# Altium PCB PCB_DTNEA-PRESS-MONITOR-RECIEVER_2021-11-17.pcbdoc
Units mm, origin at the board's own origin, x right, y up, seen from the top; angles counter-clockwise.
Board outline 112.01 x 83.69 mm, 2 copper layers (Top Layer, Bottom Layer); 32 components, 38 nets, 128 pads, 25 vias.
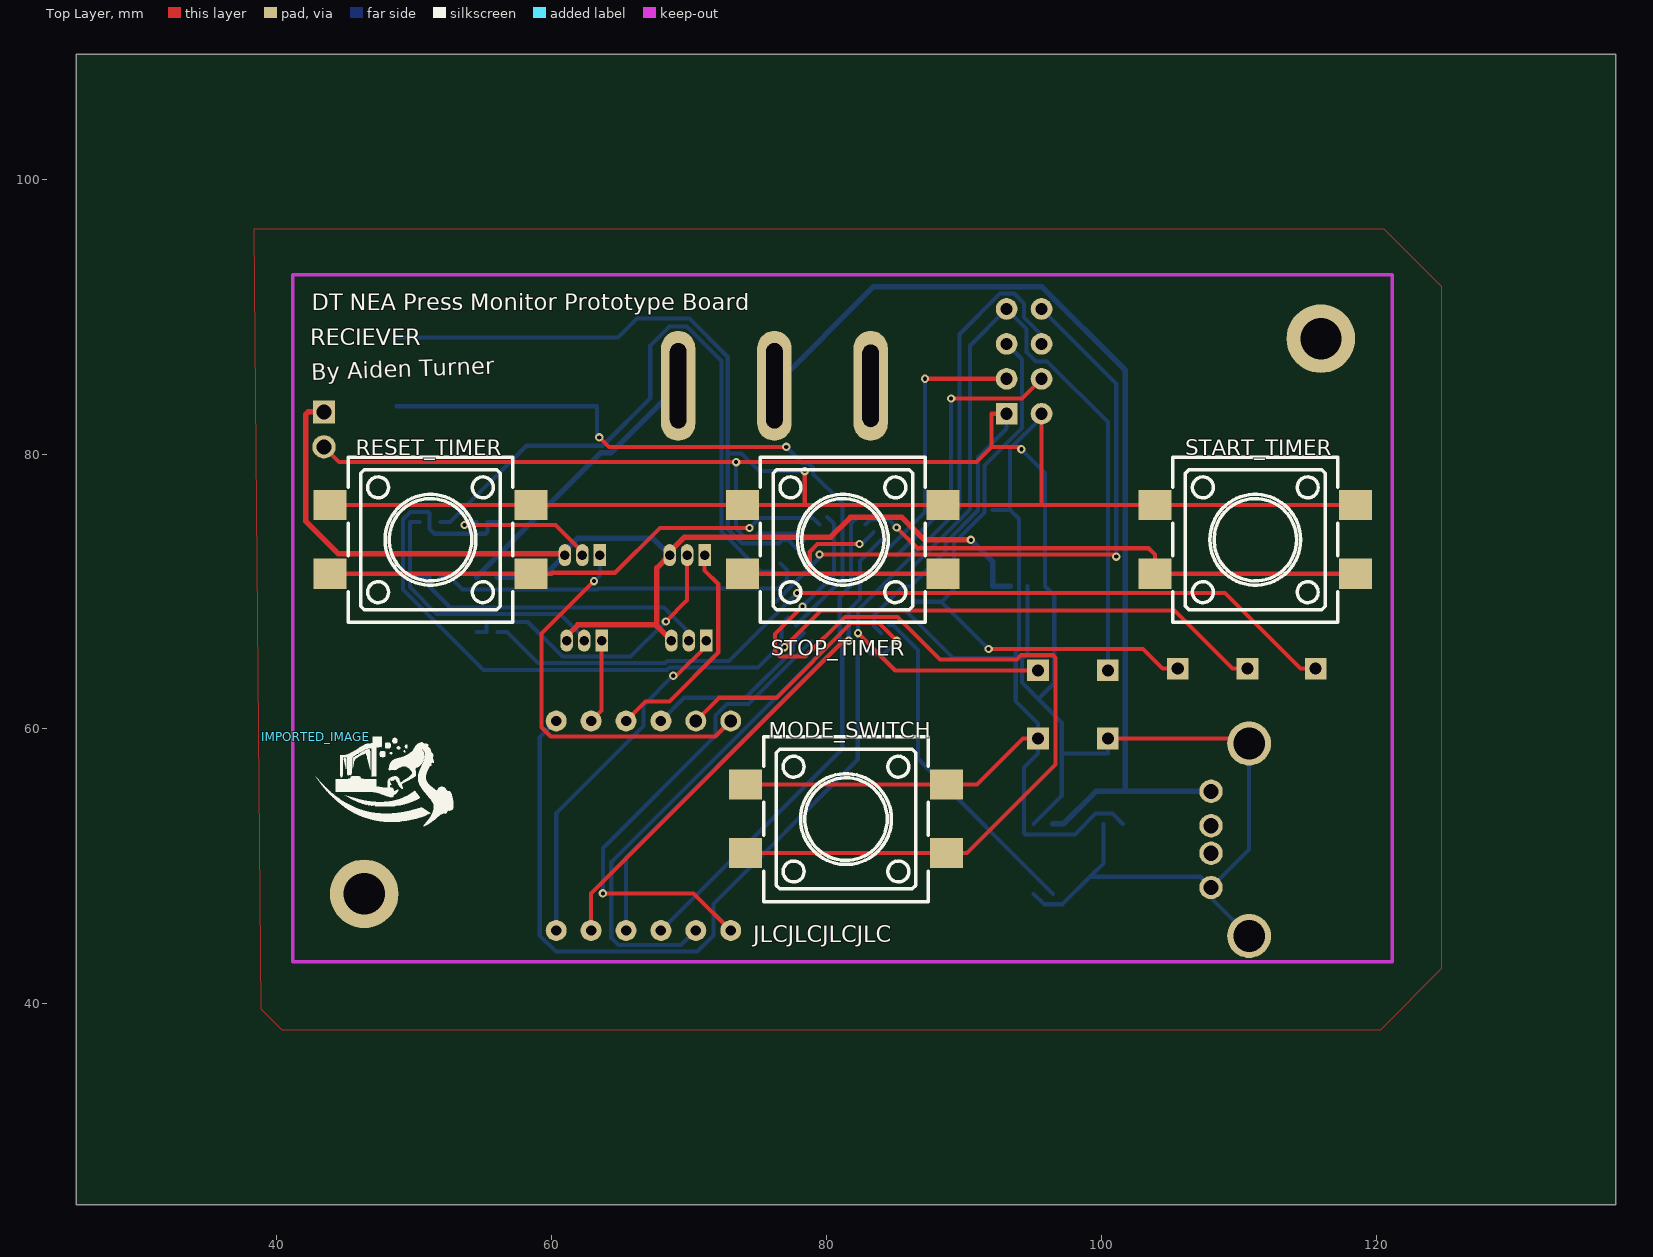
[diagram p0: Top Layer view]
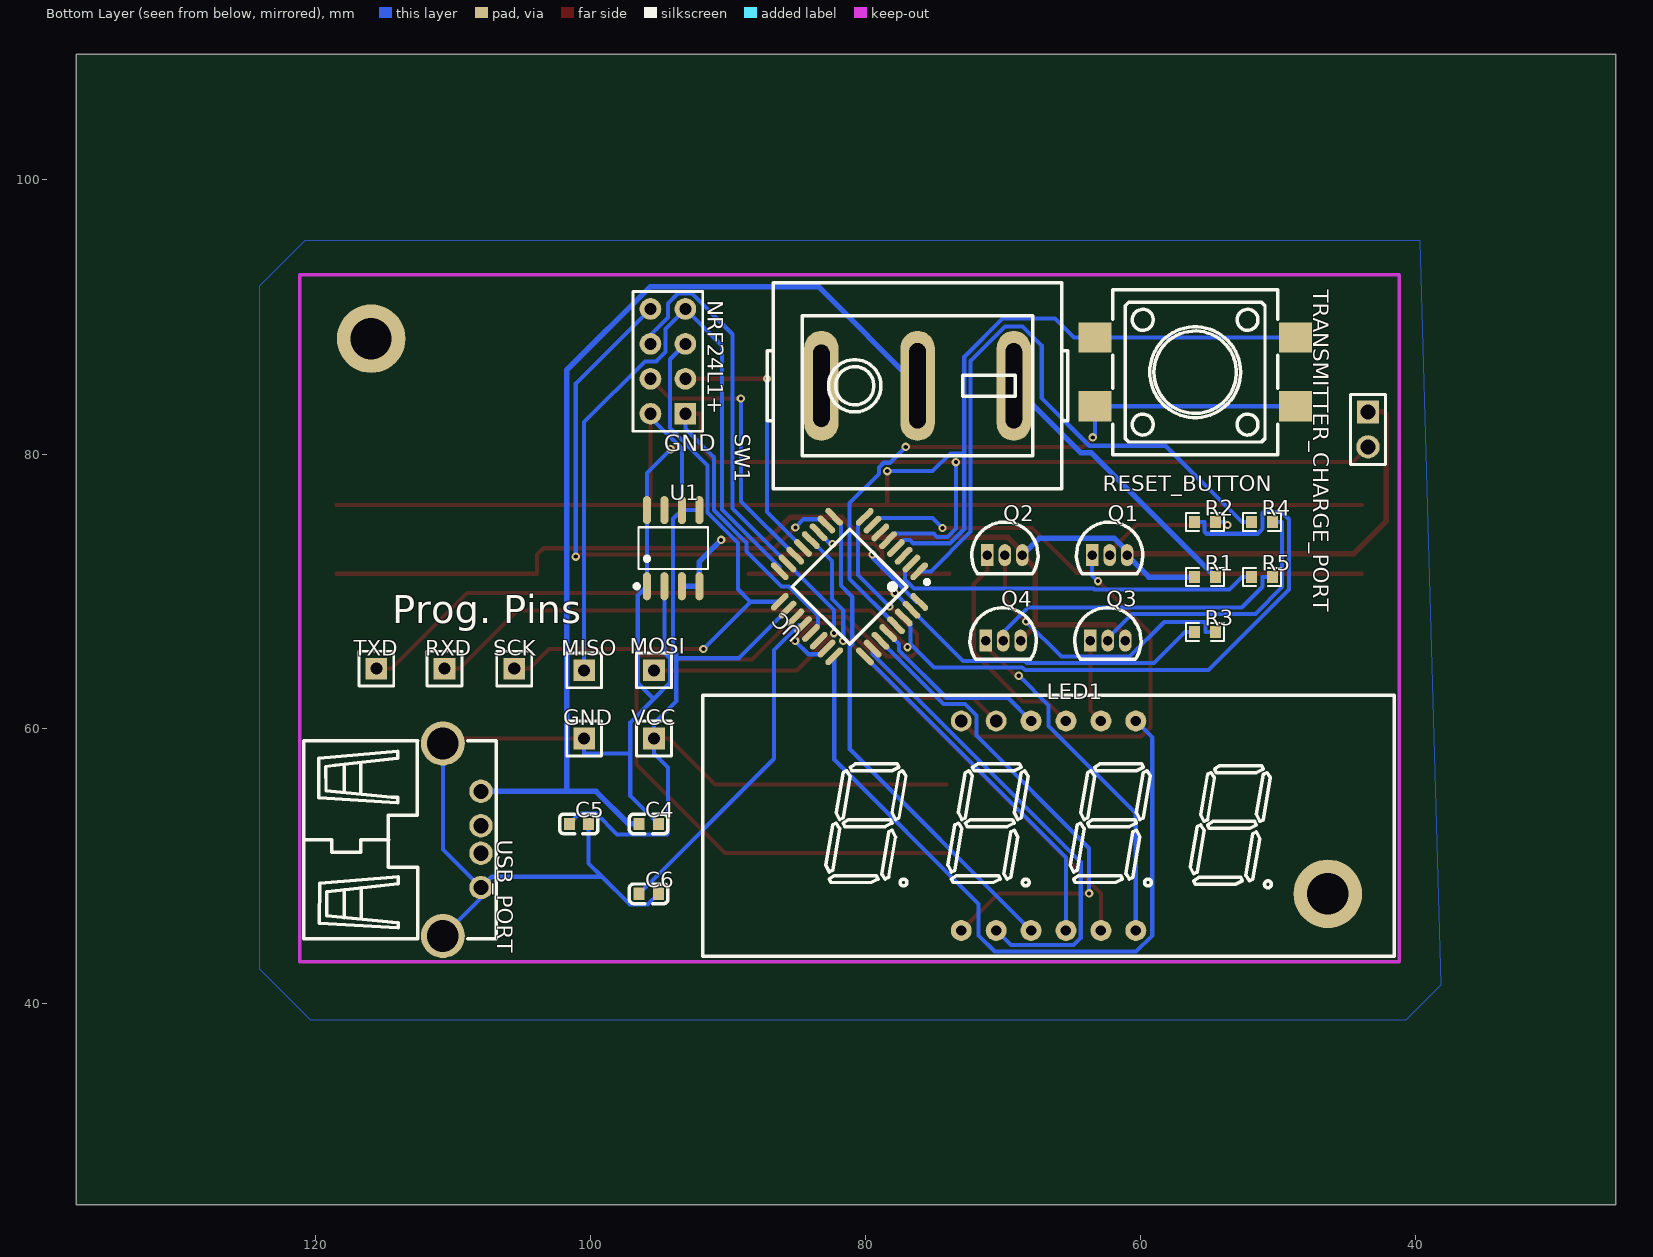
[diagram p1: Bottom Layer view, seen from below]

## Layer stack, top to bottom
Top Layer: signal copper (thickness not stored)
Dielectric: dielectric 0.32, FR-4, Dk 4.8
Bottom Layer: signal copper (thickness not stored)

## Board outline
137.414,25.4 25.4,25.4 25.4,109.093 137.414,109.093

## Components (designator, comment, footprint, x,y, rotation, side; value= is the part's Value field where it differs from the comment)
C4 "1uF" C0603 95.758,53.086 r0 bottom
C5 "1uF" C0603 100.838,53.086 r0 bottom
C6 "1uF" C0603 95.758,48.006 r0 bottom
GND "HDR-M-2.54_1x1" HDR-M-2.54_1X1 100.457,59.309 r0 bottom
IMPORTED_IMAGE "IMPORTED_IMAGE" IMPORTED_IMAGE 42.842,59.427 r0 top
LED1 "SR720561W" LED-SEG-TH_12P-L50.3-W19.0-P2.54-S15.24-BL 66.675,52.959 r0 bottom
MISO "HDR-M-2.54_1x1" HDR-M-2.54_1X1 100.457,64.262 r0 bottom
MODE_SWITCH "TS-1094S-A4B3-D1" KEY-SMD_4P-L12.0-W12.0-P5.00-LS15.2#1 81.407,53.467 r0 top
MOSI "HDR-M-2.54_1x1" HDR-M-2.54_1X1 95.377,64.262 r0 bottom
NRF24L1+ "HDR-M-2.54_2x4" HDR-M-2.54_2X4 94.361,86.741 r270 bottom
Q1 "2N3904" TO-92-3_L5.1-W4.1-P1.27-L 62.23,72.644 r0 bottom
Q2 "2N3904" TO-92-3_L5.1-W4.1-P1.27-L 69.85,72.644 r0 bottom
Q3 "2N3904" TO-92-3_L5.1-W4.1-P1.27-L 62.357,66.421 r0 bottom
Q4 "2N3904" TO-92-3_L5.1-W4.1-P1.27-L 69.977,66.421 r0 bottom
R1 "1k" R0603 55.292,71.053 r0 bottom
R2 "1k" R0603 55.292,75.053 r0 bottom
R3 "1k" R0603 55.292,67.053 r0 bottom
R4 "1k" R0603 51.148,75.053 r0 bottom
R5 "1k" R0603 51.148,71.053 r0 bottom
RESET_BUTTON "TS-1094S-A4B3-D1" KEY-SMD_4P-L12.0-W12.0-P5.00-LS15.2#2 56.007,85.979 r0 bottom
RESET_TIMER "TS-1094S-A4B3-D1" KEY-SMD_4P-L12.0-W12.0-P5.00-LS15.2#1 51.181,73.787 r0 top
RXD "HDR-M-2.54_1x1" HDR-M-2.54_1X1 110.617,64.389 r0 bottom
SCK "HDR-M-2.54_1x1" HDR-M-2.54_1X1 105.537,64.389 r0 bottom
START_TIMER "TS-1094S-A4B3-D1" KEY-SMD_4P-L12.0-W12.0-P5.00-LS15.2#1 111.181,73.787 r0 top
STOP_TIMER "TS-1094S-A4B3-D1" KEY-SMD_4P-L12.0-W12.0-P5.00-LS15.2#1 81.181,73.787 r0 top
SW1 "Rocker switch601-10211BB" SW-TH_601-10211BB 76.2,84.963 r0 bottom
TRANSMITTER_CHARGE_PORT "HDR-M-2.54_1x2" HDR-M-2.54_1X2 43.434,81.788 r90 bottom
TXD "HDR-M-2.54_1x1" HDR-M-2.54_1X1 115.57,64.389 r0 bottom
U1 "TPS77633DR" SOIC-8_L4.9-W3.9-P1.27-LS6.0-BL 93.98,73.152 r0 bottom
UC "ATMEGA328PB-AU" TQFP-32_L7.0-W7.0-P0.80-LS9.0-BL 81.153,70.358 r225 bottom
USB_PORT "A/F90 PBT White plastic_C42665" USB-A-TH_USB-M-1 109.347,51.943 r90 bottom
VCC "HDR-M-2.54_1x1" HDR-M-2.54_1X1 95.377,59.309 r0 bottom

## Footprints (in the part's own frame and the unit in brackets; to place one, negate y for a bottom-side part, rotate by r counter-clockwise, add the part's x,y. Pads: shape width x height; smd on the part's side, far side on the other; paste and mask are expansions set on the pad)
C0603 [mm]
  rect 0.8x0.9 smd: 1(0.7,0) 2(-0.7,0)
  silkscreen extent -1.39,-0.72 1.41,0.71
HDR-M-2.54_1X1 [mil]
  rect 62x62 hole 35: 1(0,0)
  silkscreen extent -50,-50 50,50
HDR-M-2.54_1X2 [mm]
  rect 1.7x1.575 hole 1.1: 1(1.27,0)
  round 1.7 hole 1.1: 2(-1.27,0)
  silkscreen extent -2.54,-1.27 2.54,1.27
HDR-M-2.54_2X4 [mil]
  rect 62x62 hole 35: 1(150,50)
  round 62 hole 35: 2(150,-50) 3(50,50) 4(50,-50) 5(-50,50) 6(-50,-50) 7(-150,50) 8(-150,-50)
  silkscreen extent -200,-100 200,100
IMPORTED_IMAGE [mm]
  silkscreen extent 0,-6.5 10,0
KEY-SMD_4P-L12.0-W12.0-P5.00-LS15.2#1 [mm]
  rect 2.4x2.2 smd: 1(-7.3,2.5) 2(7.3,2.5) 3(-7.3,-2.5) 4(7.3,-2.5)
  silkscreen extent -6,-6.02 6,5.98
KEY-SMD_4P-L12.0-W12.0-P5.00-LS15.2#2 [mm]
  rect 2.4x2.2 smd: 1(7.3,-2.5) 2(-7.3,-2.5) 3(7.3,2.5) 4(-7.3,2.5)
  silkscreen extent -6,-5.98 6,6.02
LED-SEG-TH_12P-L50.3-W19.0-P2.54-S15.24-BL [mil]
  round 60 hole 30: 1(250,300) 2(150,300) 3(50,300) 4(-50,300) 5(-150,300) 6(-250,300) 7(-250,-300) 8(-150,-300) 9(-50,-300) 10(50,-300)
  round 60 hole 36: 11(150,-300) 12(250,-300)
  silkscreen extent -990,-374 990,374
R0603 [mm]
  rect 0.806x0.864 smd: 1(0.753,0) 2(-0.753,0)
  silkscreen extent -1.39,-0.66 1.39,0.66
SOIC-8_L4.9-W3.9-P1.27-LS6.0-BL [mm]
  oval 0.588x2.045 smd: 1(1.905,2.773) 2(0.635,2.773) 3(-0.635,2.773) 4(-1.905,2.773) 5(-1.905,-2.773) 6(-0.635,-2.773) 7(0.635,-2.773) 8(1.905,-2.773)
  silkscreen extent -2.53,-1.52 2.8,2.92
SW-TH_601-10211BB [mm]
  oval 2.5x8 hole 1.2 slot 6 at 90 deg: 1(7,0)
  oval 2.5x8 hole 1.2 slot 6.2 at 90 deg: 2(0,0) 3(-7,0)
  silkscreen extent -10.92,-7.5 10.92,7.5
TO-92-3_L5.1-W4.1-P1.27-L [mm]
  rect 0.9x1.6 hole 0.7: 1(1.27,0)
  oval 0.9x1.6 hole 0.7: 2(0,0) 3(-1.27,0)
  silkscreen extent -2.41,-2.41 2.41,1.35
TQFP-32_L7.0-W7.0-P0.80-LS9.0-BL [mm]
  oval 0.45x1.65 smd: 1(2.8,4.369) 2(2,4.369) 3(1.2,4.369) 4(0.4,4.369) 5(-0.4,4.369) 6(-1.2,4.369) 7(-2,4.369) 8(-2.8,4.369) 17(-2.8,-4.369) 18(-2,-4.369) 19(-1.2,-4.369) 20(-0.4,-4.369) 21(0.4,-4.369) 22(1.2,-4.369) 23(2,-4.369) 24(2.8,-4.369)
  oval 1.65x0.45 smd: 9(-4.382,2.8) 10(-4.382,2) 11(-4.382,1.2) 12(-4.382,0.4) 13(-4.382,-0.4) 14(-4.382,-1.2) 15(-4.382,-2) 16(-4.382,-2.8) 25(4.381,-2.8) 26(4.381,-2) 27(4.381,-1.2) 28(4.381,-0.4) 29(4.381,0.4) 30(4.381,1.2) 31(4.381,2) 32(4.381,2.8)
  silkscreen extent -2.94,-2.95 3.91,4.36
USB-A-TH_USB-M-1 [mm]
  round 1.7 hole 1.1: 1(3.52,-1.386) 2(1.019,-1.386) 3(-0.98,-1.386) 4(-3.48,-1.386)
  round 3.2 hole 2.3: 5(7,1.386) 6(-7,1.386)
  silkscreen extent -7.2,-2.49 7.2,11.51

## Free pads (board coordinates)
  round 5 hole 3: 1(46.355,48.006) 1(115.951,88.392)

## Via types
v1: diameter 0.61, hole 0.305, Top Layer to Bottom Layer, 25 vias

## Nets (pads, with @x,y where several pads share a name; then routed paths per layer and width w, separated by ;. In a path a pad name is that pad's centre, name@x,y a point inside that pad or via, vN(x,y) a via of type N, cw(c..) or ccw(c..) an arc to the next point about the centre after c; other vN are vias at no path point)
GND: C4.2 C5.2 C6.2 GND.1 NRF24L1+.1 TRANSMITTER_CHARGE_PORT.2 U1.1 U1.2 U1.8 UC.5 UC.21 USB_PORT.4 USB_PORT.5 USB_PORT.6 | length 174.9
  Top Layer w0.3: TRANSMITTER_CHARGE_PORT.2 44.541,79.411 v1(73.415,79.411) 90.892,79.411 91.999,80.518 ; NRF24L1+.1 91.999,82.931 91.999,80.518 ; v1@94.167,80.342 93.99,80.518 91.999,80.518 ; GND.1 110.367,59.309 USB_PORT.5
  Bottom Layer w0.3: v1(73.415,79.411) 73.415,74.572 74.022,73.964 74.773,73.964 75.026,74.218 77.859,74.218 UC.5 ; UC.21 83.453,67.493 83.453,68.261 85.55,70.358 86.104,70.358 88.645,72.899 88.645,73.543 91.012,75.91 91.012,79.761 93.091,81.839 NRF24L1+.1 ; v1@94.167,80.342 95.885,78.623 U1.8 95.885,70.38 96.558,69.707 96.558,63.35 95.394,62.186 ; U1.2@94.615,70.38 94.615,65.534 94.207,65.126 94.207,63.372 95.394,62.186 ; C6.2 95.813,47.251 97.163,47.251 99.16,49.248 ; C4.2 97.098,55.126 97.098,58.217 ; C5.2 100.138,50.227 99.16,49.248 ; GND.1 100.457,58.217 97.098,58.217 ; USB_PORT.6 107.961,47.714 USB_PORT.4 ; USB_PORT.5 110.733,51.234 USB_PORT.4 ; 95.394,62.186 97.098,60.481 97.098,58.217 ; 99.16,49.248 107.176,49.248 USB_PORT.4
  other v1: 94.167,80.341
LED1_6: LED1.6 Q4.1 | length 25.7
  Top Layer w0.3: v1(68.836,63.873) 69.073,63.873 71.247,66.047 Q4.1
  Bottom Layer w0.3: LED1.6 60.325,53.865 66.675,60.215 66.675,61.712 v1(68.836,63.873)
LED1_8: LED1.8 Q3.1 | length 6.2
  Top Layer w0.3: LED1.8 63.627,61.341 Q3.1
LED1_9: LED1.9 Q2.1 | length 16.3
  Top Layer w0.3: LED1.9 66.833,62.008 68.562,62.008 72.114,65.559 72.114,70.546 71.12,71.54 Q2.1
LED1_12: LED1.12 Q1.1 | length 28.8
  Top Layer w0.3: v1(63.077,70.754) 59.256,66.933 59.256,60.124 59.929,59.451 71.896,59.451 LED1.12
  Bottom Layer w0.3: v1(63.077,70.754) 63.5,71.178 Q1.1
Q1_2: Q1.2 R2.2 | length 10.6
  Top Layer w0.3: v1(53.655,74.837) 60.275,74.836 62.23,72.882 Q1.2
  Bottom Layer w0.3: v1(53.655,74.837) 53.831,75.013 53.831,75.053 R2.2
Q2_2: Q2.2 R3.2 | length 22.1
  Top Layer w0.3: v1(68.304,67.821) 69.85,69.366 Q2.2
  Bottom Layer w0.3: R3.2 55.246,67.053 55.246,67.761 55.275,67.79 58.258,67.79 60.788,65.26 65.743,65.26 v1(68.304,67.821)
Q3_2: Q3.2 R4.2 | length 19.8
  Bottom Layer w0.3: R4.2 49.687,75.053 49.687,70.316 51.629,68.375 60.592,68.375 62.357,66.61 Q3.2
Q4_2: Q4.2 R5.2 | length 22.3
  Bottom Layer w0.3: R5.2 51.102,71.053 51.102,70.346 52.618,68.83 68.158,68.83 69.977,67.01 Q4.2
R1_2: R1.2 SW1.3 | length 20.4
  Bottom Layer w0.4: R1.2 63.585,80.099 64.336,80.099 SW1.3
S$1370: 
U1_3: Q1.3 Q2.3 Q3.3 Q4.3 R1.1 TRANSMITTER_CHARGE_PORT.1 U1.3 U1.4 | length 86.9
  Top Layer w0.4: TRANSMITTER_CHARGE_PORT.1 42.295,83.058 42.098,82.861 42.098,75.116 44.473,72.741 60.863,72.741 Q1.3 ; Q3.3 61.087,66.765 61.897,67.575 67.646,67.575 ; Q4.3 67.646,67.482 67.646,67.575 ; v1(90.49,73.756) 87.103,73.756 85.473,75.386 81.722,75.386 80.293,73.957 69.648,73.957 68.58,72.889 Q2.3 67.646,71.71 67.646,67.575
  Bottom Layer w0.4: R1.1 59.369,71.053 Q1.3 60.96,72.945 61.882,73.867 67.357,73.867 Q2.3 ; v1(90.49,73.756) 92.075,72.17 92.075,70.38 U1.3@93.345,70.38
UC_1: R4.1 UC.1 | length 47
  Bottom Layer w0.3: R4.1 52.609,75.053 58.159,80.603 63.714,80.603 67.172,84.061 67.172,87.894 68.566,89.288 69.832,89.288 72.34,86.78 72.34,74.359 75.232,71.467 UC.1
UC_2: R5.1 UC.2 | length 27.2
  Bottom Layer w0.3: R5.1 52.609,71.053 53.517,70.145 63.329,70.145 63.406,70.221 76.466,70.221 77.112,70.868 77.112,71.571 UC.2@76.65,72.033
UC_4: C5.1 MODE_SWITCH.1 MODE_SWITCH.2 NRF24L1+.2 RESET_BUTTON.1 RESET_BUTTON.2 RESET_TIMER.1 RESET_TIMER.2 START_TIMER.1 START_TIMER.2 STOP_TIMER.1 STOP_TIMER.2 U1.5 U1.6 UC.4 UC.18 VCC.1 | length 208.5
  Top Layer w0.3: RESET_TIMER.1 45.385,76.287 RESET_TIMER.2 STOP_TIMER.1 78.408,76.287 ; MODE_SWITCH.1 MODE_SWITCH.2 90.943,55.967 94.285,59.309 VCC.1 ; v1(78.408,78.757) 78.408,76.287 ; NRF24L1+.2 95.631,76.287 ; START_TIMER.2 START_TIMER.1 95.631,76.287 ; 78.408,76.287 STOP_TIMER.2 95.631,76.287
  Bottom Layer w0.3: RESET_BUTTON.2 RESET_BUTTON.1 64.811,88.479 66.196,89.863 70.015,89.863 72.806,87.073 72.806,80.05 ; UC.4 77.208,73.737 76.754,73.737 76.526,73.509 73.834,73.509 72.806,74.537 72.806,80.05 ; v1(78.408,78.757) 75.102,78.757 73.809,80.05 72.806,80.05 ; UC.18 89.193,65.147 93.752,65.147 ; U1.5 U1.6 ; NRF24L1+.2 95.631,82.668 93.345,80.382 U1.6 ; C5.1 100.783,53.841 99.567,53.841 98.058,52.331 94.441,52.331 94.353,52.419 94.353,57.194 95.377,58.217 95.377,58.784 VCC.1 95.377,60.401 93.752,62.025 93.752,65.147 ; U1.6 93.98,75.289 93.98,65.77 93.752,65.543 93.752,65.147
UC_7: RESET_TIMER.3 RESET_TIMER.4 UC.7 | length 37.5
  Top Layer w0.3: RESET_TIMER.3 RESET_TIMER.4 59.985,71.287 60.062,71.364 64.613,71.364 67.87,74.621 v1(74.391,74.621)
  Bottom Layer w0.3: v1(74.391,74.621) 75.109,75.339 79.001,75.339 UC.7
UC_8: MODE_SWITCH.3 MODE_SWITCH.4 UC.8 | length 68
  Top Layer w0.3: MODE_SWITCH.3 MODE_SWITCH.4 90.211,50.967 96.65,57.405 96.65,65.173 96.457,65.365 94.139,65.365 93.834,65.061 88.257,65.061 85.168,68.149 81.33,68.149 78.442,65.261 76.624,65.261 76.237,65.649 76.237,66.909 v1(78.239,68.91)
  Bottom Layer w0.3: v1(78.239,68.91) 80.534,71.206 80.534,74.937 UC.8
UC_9: LED1.3 UC.9 | length 36.2
  Bottom Layer w0.3: LED1.3 81.13,58.524 81.13,66.013 80.953,66.191 80.953,69.602 81.777,70.426 81.777,74.942 UC.9
UC_10: START_TIMER.3 START_TIMER.4 UC.10 | length 38.3
  Top Layer w0.3: v1(85.091,74.653) 86.598,73.146 103.426,73.146 103.881,72.691 START_TIMER.3 START_TIMER.4
  Bottom Layer w0.3: UC.10 83.225,75.258 84.486,75.258 v1(85.091,74.653)
UC_11: STOP_TIMER.3 STOP_TIMER.4 UC.11 | length 21.4
  Top Layer w0.3: STOP_TIMER.3 78.768,71.287 ; v1(82.386,73.452) 79.347,73.453 78.768,72.874 78.768,71.287 ; STOP_TIMER.4 78.768,71.287
  Bottom Layer w0.3: v1(82.386,73.452) 82.551,73.453 UC.11
UC_12: LED1.5 UC.12 | length 37.4
  Top Layer w0.3: LED1.5 62.865,48.044 81.242,66.421 v1(81.603,66.42)
  Bottom Layer w0.3: v1(81.603,66.42) 81.603,68.624 82.433,69.453 82.433,72.204 UC.12
UC_13: NRF24L1+.3 UC.13 | length 19.3
  Top Layer w0.3: v1(87.152,85.471) NRF24L1+.3
  Bottom Layer w0.3: UC.13 87.152,75.792 v1(87.152,85.471)
UC_14: NRF24L1+.4 UC.14 | length 20.2
  Top Layer w0.3: v1(89.051,84.04) 94.2,84.04 NRF24L1+.4
  Bottom Layer w0.3: UC.14 89.051,76.559 v1(89.051,84.04)
UC_15: MOSI.1 NRF24L1+.6 UC.15 | length 48.7
  Top Layer w0.3: v1(82.281,66.971) 84.989,64.262 MOSI.1
  Bottom Layer w0.3: v1(82.281,66.971) 82.281,68.657 UC.15 89.66,76.037 89.66,88.714 92.617,91.67 93.648,91.67 94.361,90.957 94.361,89.925 95.631,88.655 NRF24L1+.6
UC_16: MISO.1 NRF24L1+.7 UC.16 | length 51.7
  Bottom Layer w0.3: UC.16 86.231,71.772 90.415,75.956 90.415,87.875 NRF24L1+.7 94.539,89.103 94.539,87.415 95.213,86.741 96.034,86.741 100.454,82.321 100.454,65.357 100.457,65.354 MISO.1
UC_17: NRF24L1+.5 SCK.1 UC.17 | length 43
  Top Layer w0.3: v1(91.778,65.82) 103.014,65.82 104.445,64.389 SCK.1
  Bottom Layer w0.3: UC.17 88.349,69.249 ; v1(91.778,65.82) 88.349,69.249 ; NRF24L1+.5 94.207,86.896 94.207,81.887 91.477,79.157 91.477,75.73 89.261,73.515 89.261,70.161 88.349,69.249
UC_20: C6.1 UC.20 | length 24.7
  Bottom Layer w0.3: UC.20 84.826,67.552 86.631,65.747 86.631,57.833 C6.1
UC_23: LED1.11 UC.23 | length 21
  Top Layer w0.3: LED1.11 72.173,62.267 76.354,62.267 81.781,67.694 83.822,67.694 v1(85.111,66.405)
  Bottom Layer w0.3: UC.23@82.828,65.855 83.246,65.437 84.142,65.437 v1(85.111,66.405)
UC_24: LED1.7 UC.24 | length 54.4
  Bottom Layer w0.3: LED1.7 59.127,59.381 59.127,44.988 60.316,43.799 70.588,43.799 71.755,44.966 71.755,47.269 82.262,57.776 UC.24
UC_25: LED1.4 UC.25 | length 26
  Bottom Layer w0.3: LED1.4 65.405,50.65 UC.25
UC_26: LED1.2 UC.26 | length 34.1
  Bottom Layer w0.3: LED1.2 69.416,44.27 64.864,44.27 64.333,44.802 64.333,50.327 79.469,65.463 UC.26@79.469,65.846
UC_27: LED1.1 UC.27 | length 36
  Top Layer w0.3: v1(63.724,48.041) 70.323,48.041 LED1.1
  Bottom Layer w0.3: v1(63.724,48.041) 63.724,51.32 71.916,59.513 71.916,60.987 72.747,61.818 74.31,61.818 UC.27
UC_28: LED1.10 UC.28 | length 13.3
  Bottom Layer w0.3: LED1.10 69.639,62.273 74.113,62.273 77.542,65.703 77.542,66.182 UC.28
UC_29: RESET_BUTTON.3 RESET_BUTTON.4 UC.29 | length 47.2
  Top Layer w0.3: v1(63.461,81.212) 64.155,80.518 v1(77.062,80.518)
  Bottom Layer w0.3: RESET_BUTTON.4 RESET_BUTTON.3 63.307,81.366 v1(63.461,81.212) ; v1(77.062,80.518) 78.213,79.366 78.661,79.366 79.018,79.01 79.018,78.562 81.153,76.427 81.153,70.923 UC.29
UC_30: R2.1 RXD.1 UC.30 | length 84
  Top Layer w0.3: v1(76.933,65.955) 79.582,68.604 105.31,68.604 109.525,64.389 RXD.1
  Bottom Layer w0.3: R2.1 55.338,75.053 55.338,74.345 55.191,74.198 51.465,74.198 51.103,74.561 51.103,75.702 51.015,75.79 49.73,75.79 49.194,75.253 49.194,70.147 55.043,64.298 68.399,64.298 68.583,64.482 75.001,64.482 76.704,66.184 ; v1(76.933,65.955) 76.704,66.184 ; UC.30 76.704,67.606 76.704,66.184
UC_31: R3.1 TXD.1 UC.31 | length 64.8
  Top Layer w0.3: v1(77.849,69.883) 108.985,69.883 114.478,64.389 TXD.1
  Bottom Layer w0.3: R3.1 56.753,67.053 59.001,64.805 68.262,64.805 68.394,64.937 72.904,64.937 76.641,68.674 v1(77.849,69.883)
UC_32: NRF24L1+.8 UC.32 | length 46.9
  Top Layer w0.3: v1(79.479,72.691) 100.907,72.691 v1(101.063,72.535)
  Bottom Layer w0.3: UC.32 76.266,69.24 79.479,72.452 v1(79.479,72.691) ; NRF24L1+.8 101.063,85.119 v1(101.063,72.535)
USB_PORT_1: C4.1 SW1.2 USB_PORT.1 | length 74.1
  Bottom Layer w0.4: SW1.2 83.412,92.175 95.645,92.175 101.722,86.098 101.722,55.464 ; C4.1 97.21,53.086 99.588,55.464 101.722,55.464 ; USB_PORT.1 101.722,55.464
pads on no net: SW1.1 U1.7 UC.3 UC.6 UC.19 UC.22 USB_PORT.2 USB_PORT.3

## Polygon pours and split planes (outlines as drawn)
GND on Bottom Layer (solid): 39.624,95.504 120.777,95.504 124.079,92.202 124.079,42.545 120.396,38.862 40.64,38.862 38.1,41.402
GND on Top Layer (solid): 38.354,96.393 120.523,96.393 124.714,92.202 124.714,42.545 120.269,38.1 40.386,38.1 38.862,39.624

## Silkscreen, mask and mechanical layers (free items; w line width, h text height)
Top Overlay:
  text "DT NEA Press Monitor Prototype Board" at 42.545,90.043 h2.03
  text "RECIEVER" at 42.418,87.503 h2.03
  text "By Aiden Turner" at 42.545,84.963 h2.03 r2
  text "JLCJLCJLCJLC" at 74.676,44.069 h2.03
Bottom Overlay:
  text "GND" at 94.615,79.756 h2.03 r359
  text "Prog. Pins" at 114.427,67.691 h2.03